# Altium PCB PCB.PcbDoc (part 1 of 2)
Units mil, origin at the board's own origin, x right, y up, seen from the top; angles counter-clockwise.
Board outline 1700 x 700 mil, 4 copper layers (TOP, GND, SIG, BOTTOM), stack 62.441 mil thick; 81 components, 66 nets, 310 pads, 129 vias.
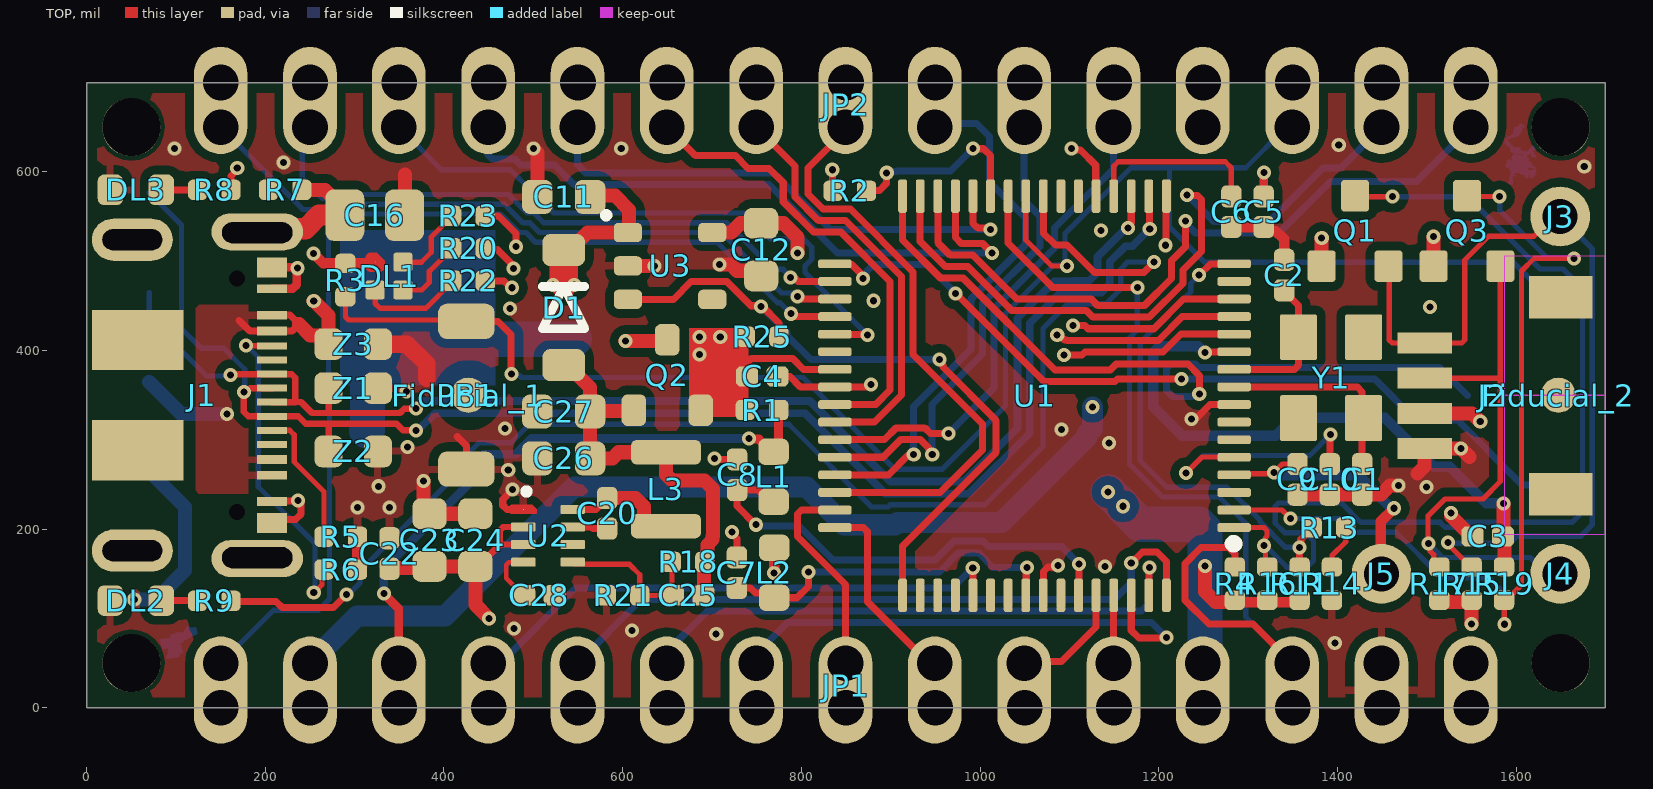
[diagram p0: TOP view]
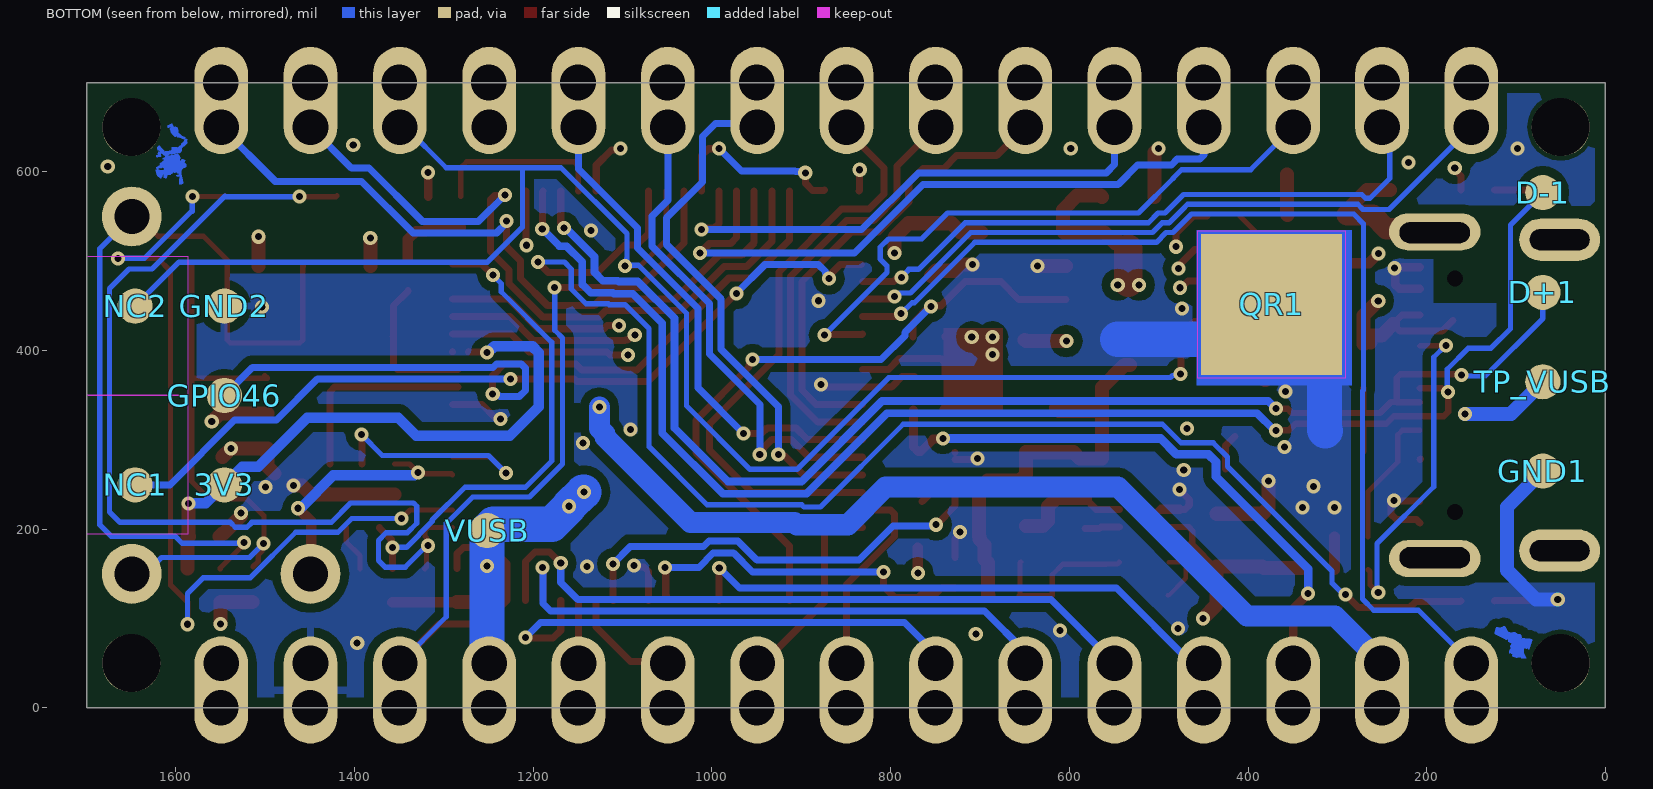
[diagram p1: BOTTOM view, seen from below]
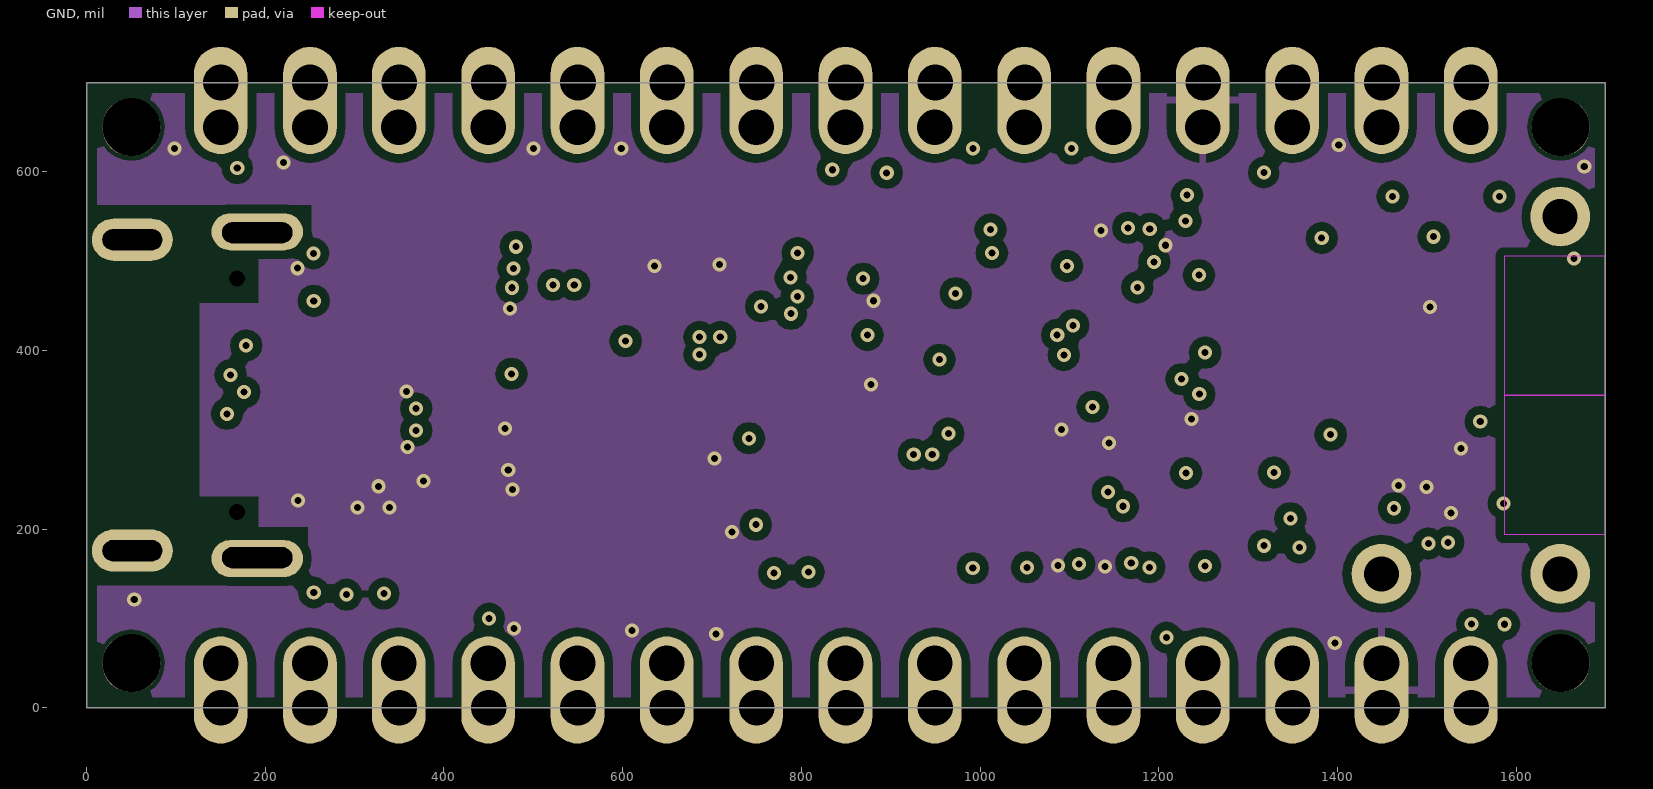
[diagram p2: GND]
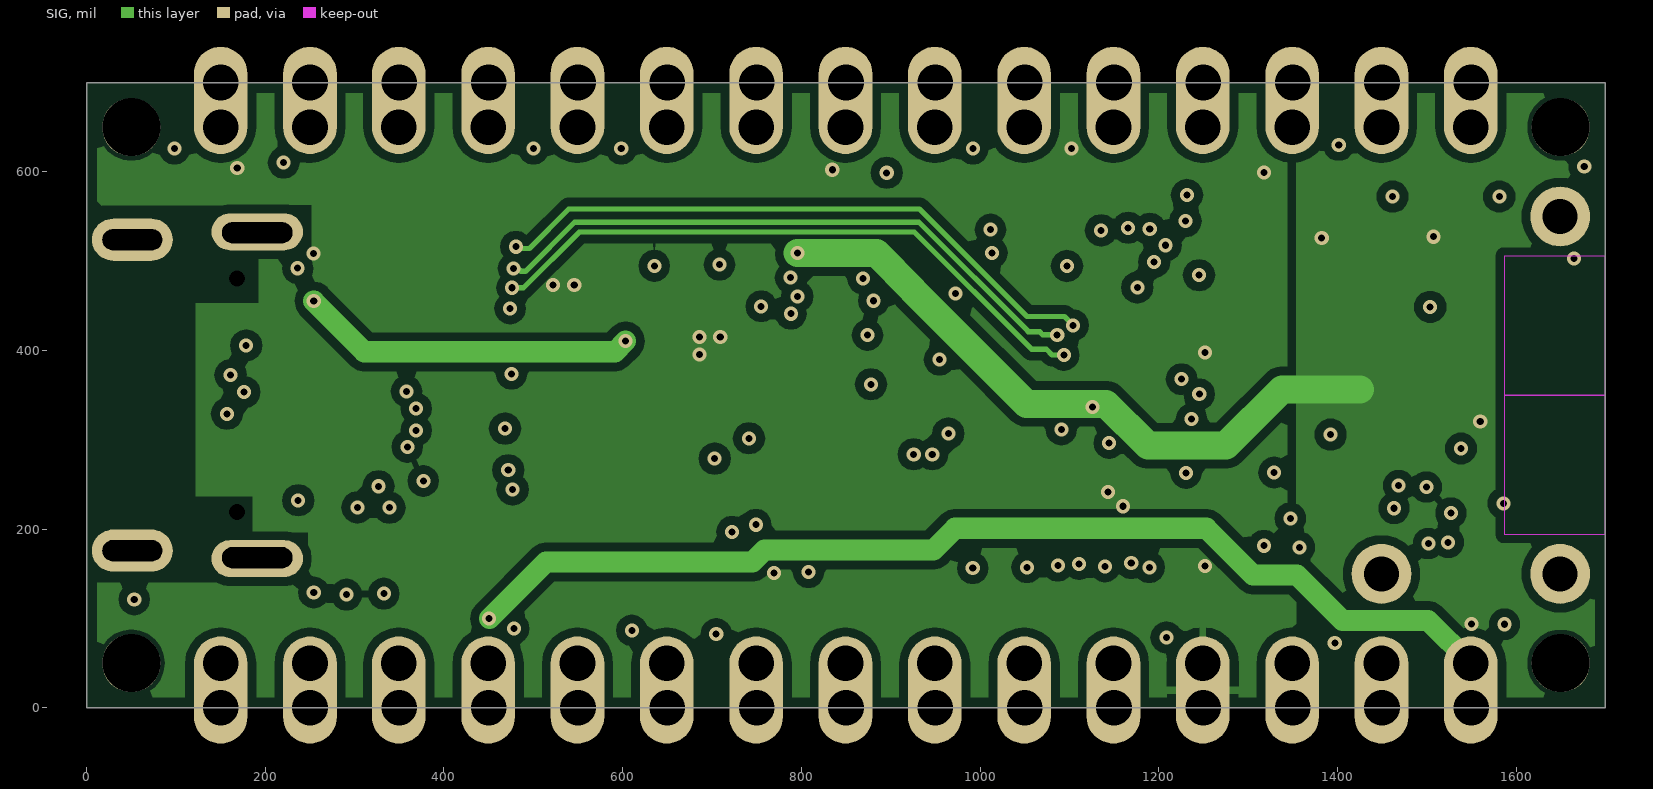
[diagram p3: SIG]
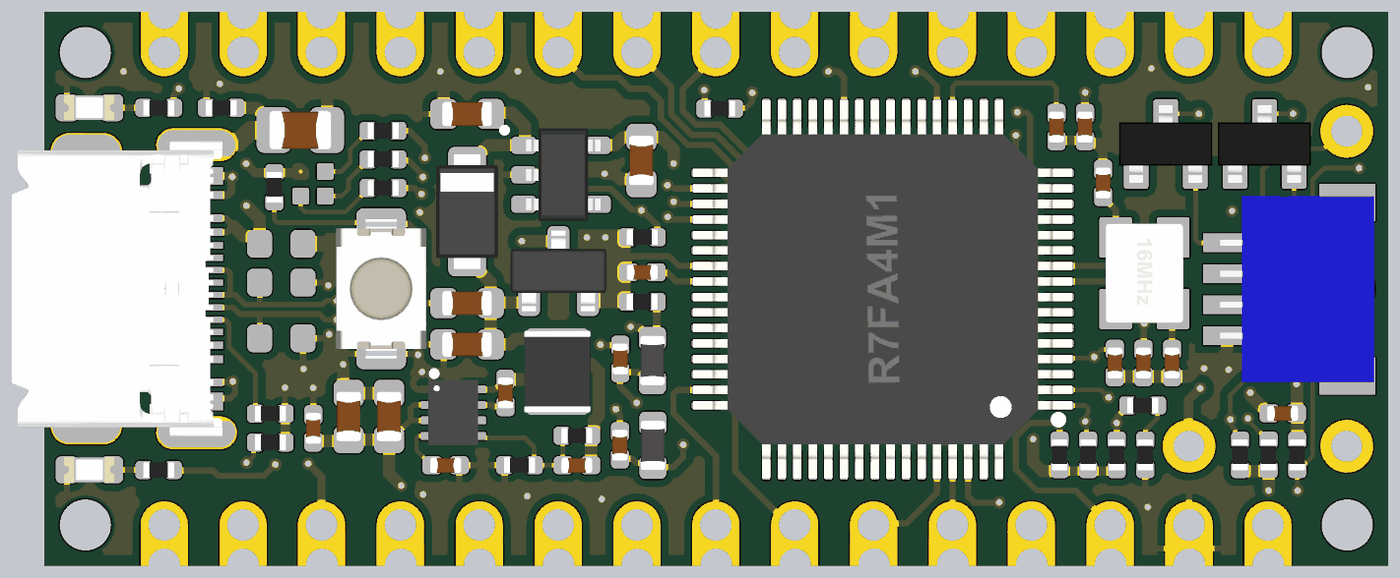
[diagram p5: 3D render of the assembled board from above, using the file's embedded part models]

## Layer stack, top to bottom
Top Solder: solder mask 1, SM-003, Dk 4
TOP: signal copper 0.7087
Dielectric 1: prepreg 5.5118, PP-014, Dk 4.2
GND: signal copper 1.378
Dielectric2: core 47.2441, FR-4, Dk 4.8
SIG: signal copper 1.378
Dielectric3: prepreg 5.5118, PP-014, Dk 4.2
BOTTOM: signal copper 0.7087
Bottom Solder: solder mask 1, SM-003, Dk 4

## Board outline
0,0 1700,0 1700,700 0,700

## Design rules (kind name [scope] priority, off if disabled: settings)
BoardOutlineClearance BoardOutlineClearance_2 [Component = 'J1'] p1: gap=3.94 ignorepadtopadclearanceinfootprint=FALSE
BoardOutlineClearance BoardOutlineClearance_1 [(ObjectKind = 'Pad') And (Name = 'Free-2') And (PadShape_AllLayers = 'Rounded Rectangle') And (AsMM(PadXSize_AllLayers) = 1.3) And (AsMM(PadYSize_AllLayers) = 1.8)] p2: gap=3.94 ignorepadtopadclearanceinfootprint=FALSE
BoardOutlineClearance HeadersCastellated [((ObjectKind = 'Pad') And (Component = 'JP1')) OR                                                                                    ((ObjectKind = 'Pad') And (Component = 'JP2'))] p3: gap=0 ignorepadtopadclearanceinfootprint=FALSE
BoardOutlineClearance Silks [(OnLayer('Top Overlay') OR OnLayer('Bottom Overlay'))] p4: gap=0 ignorepadtopadclearanceinfootprint=FALSE
BoardOutlineClearance [All] p5: gap=11.81 ignorepadtopadclearanceinfootprint=FALSE
Clearance GND_50R [InNetClass('50R') vs InNet('GND')] p1: gap=5 ignorepadtopadclearanceinfootprint=FALSE
Clearance QR [InComponent('QR1') vs InNet('GND')] p2: gap=5.91 ignorepadtopadclearanceinfootprint=FALSE except(0: Arc-SMDPad Arc-Fill Arc-Poly Arc-Region Track-SMDPad Track-Fill Track-Poly Track-Region SMDPad-SMDPad SMDPad-Fill SMDPad-Poly SMDPad-Region THPad-Fill THPad-Poly THPad-Region Via-Fill Via-Poly Via-Region Fill-Fill Fill-Poly Fill-Region Poly-Poly Poly-Region Region-Region)
Clearance COPPER_0.25mm [All] p3: gap=5 ignorepadtopadclearanceinfootprint=FALSE except(9.84: Arc-Fill Arc-Poly Arc-Region Track-Fill Track-Poly Track-Region SMDPad-Fill SMDPad-Poly SMDPad-Region THPad-Fill THPad-Poly THPad-Region Via-Fill Via-Poly Via-Region Fill-Fill Fill-Poly Fill-Region Poly-Poly Poly-Region Region-Region)
Clearance "Generic clearance 0.127mm" [All] p4: gap=5 ignorepadtopadclearanceinfootprint=TRUE
ComponentClearance TP2 [((Name = 'MTDI') OR (Name = 'MTDO') OR (Name = 'MTCK') OR (Name = 'MTMS'))] p1: gap=-78.74 collisioncheckmode=3 verticalgap=0 showdistances=FALSE
ComponentClearance TP [HasFootprint('TP-1.00MM') vs HasFootprint('TP-1.00MM')] p2: gap=7.87 collisioncheckmode=3 verticalgap=-393.7 showdistances=FALSE
ComponentClearance UFL_ANTENNA [InComponent('ANT1') vs HasFootprint('U.FL-R-SMT-1(60)-1')] p3: gap=-787.4 collisioncheckmode=3 verticalgap=-787.4 showdistances=FALSE
ComponentClearance Headers [((Footprint = 'PINHD-1X14_5VF') OR (Footprint = 'PINHD-1X14_5VF') OR (Footprint = 'LEDC1608X80N-AK') OR (Footprint = 'CX90B-16P-Footprint-1') ) vs ((Footprint = 'PINHD-1X14_5VF') OR (Footprint = 'PINHD-1X14_5VF') OR (Footprint = 'LEDC1608X80N-AK') OR (Footprint = 'CX90B-16P-Footprint-1'))] p4: gap=-787.4 collisioncheckmode=3 verticalgap=-787.4 showdistances=FALSE
ComponentClearance RFshield [HasFootprint('Shield RF 10mm x 15mm x 3mm-Footprint-1')] p5: gap=-1968.5 collisioncheckmode=3 verticalgap=-787.4 showdistances=FALSE
ComponentClearance fiducials [InComponent('Fiducial_1') vs InComponent('PB1')] p6: gap=-787.4 collisioncheckmode=3 verticalgap=-787.4 showdistances=FALSE
ComponentClearance [All] p7: gap=7.87 collisioncheckmode=3 verticalgap=0 showdistances=TRUE
DiffPairsRouting USB [InDifferentialPairClass('USB')] p1: maxlimit=9.84 minlimit=5.91 mostfreqgap=9.84 toplayer_maxgap=5.91 toplayer_prefgap=5.91 toplayer_minwidth=8.66 toplayer_maxwidth=8.66 toplayer_prefwidth=8.66 midlayer2_mingap=9.84 midlayer2_minwidth=5.91 midlayer2_maxwidth=5.91 midlayer2_prefwidth=5.91 bottomlayer_maxgap=5.91 bottomlayer_prefgap=5.91 bottomlayer_minwidth=8.66 bottomlayer_maxwidth=8.66 bottomlayer_prefwidth=8.66 impedanceprofiledriven=TRUE impedanceprofileid={0EDCC732-50F3-4DDA-8B94-FDD99B063592} impedanceprofilevalue=90.000000 maxuncoupledlength=500
Height [All] p1: minheight=0 maxheight=1181.1 prefheight=500
HoleSize [All] p1: absolutevalues=TRUE maxlimit=1181.1 minlimit=7.87 maxpercent=80.000 minpercent=20.000
HoleToHoleClearance [All] p1: gap=9.84 allowstackedmicrovias=FALSE
PlaneConnect [All] p1: pad.planeconnectstyle=Relief pad.reliefexpansion=20 pad.reliefentries=4 pad.reliefconductorwidth=5.91 pad.reliefairgap=10 via.planeconnectstyle=Direct via.reliefexpansion=20 via.reliefentries=4 via.reliefconductorwidth=10 via.reliefairgap=10
PolygonConnect 0201 [HasFootprint('RES-0201') OR HasFootprint('CAP-0201')] p1: connectstyle=Relief reliefconductorwidth=5.91 reliefentries=4 polygonreliefangle="90 Angle" airgapwidth=10
PolygonConnect [All] p2: thpad.connectstyle=Relief thpad.reliefconductorwidth=7.87 thpad.reliefentries=4 thpad.polygonreliefangle="90 Angle" thpad.airgapwidth=10 smdpad.connectstyle=Relief smdpad.reliefconductorwidth=7.87 smdpad.reliefentries=4 smdpad.polygonreliefangle="90 Angle" smdpad.airgapwidth=10 via.connectstyle=Direct via.reliefconductorwidth=10 via.reliefentries=4 via.polygonreliefangle="90 Angle" via.airgapwidth=10
RoomDefinition TOP [InComponentClass('TOP')] p1: confinementstyle=ConfineIn formatcopy=TRUE lockcomponents=FALSE outline 1755.91,102.36 1913.39,102.36 1913.39,220.47 1755.91,220.47
RoutingVias StandardVias [All] p1: holewidth=7.87 width=15.75 viastyle="Through Hole" minholewidth=7.87 minwidth=15.75 maxholewidth=7.87 maxwidth=15.75
ShortCircuit [Component = 'SJ1' vs (InNet('+3V3') OR InNet('NetC25_2'))] p1: allowed=TRUE
SilkToSilkClearance [All] p1: silktosilkclearance=7.87
SilkToSolderMaskClearance [IsPad] p1: minsilkscreentomaskgap=5.91 clearancetoexposedcopper=TRUE
SolderMaskExpansion VIAtented [IsVia] p1: expansion=4 istentingtop=TRUE
SolderMaskExpansion [All] p2: expansion=1.97 istentingtop=FALSE
SupplyNets "Schematic Supply Nets_6" [InNet('+VBUS')] p1: voltage=0.000
SupplyNets "Schematic Supply Nets_4" [InNet('+5V')] p2: voltage=0.000
SupplyNets "Schematic Supply Nets_3" [InNet('GND')] p3: voltage=0.000
SupplyNets "Schematic Supply Nets_1" [InNet('+3V3')] p4: voltage=0.000
SupplyNets "Schematic Supply Nets" [InNet('VIN')] p5: voltage=0.000
UnConnectedPin [All] p1:
UnRoutedNet [All] p1: checkbadconnections=TRUE
ViasUnderSMD Flash [(ObjectKind = 'Pad') And (Name = 'U2-9')] p1: allowed=TRUE
ViasUnderSMD uC [(ObjectKind = 'Pad') And (Name = 'U4-49')] p2: allowed=TRUE
ViasUnderSMD [All] p3: allowed=FALSE
Width 50R [InNetClass('50R')] p1: maxlimit=10 minlimit=7.87 preferedwidth=10 toplayer_maxwidth=8.46 toplayer_prefwidth=8.46 impedanceprofiledriven=TRUE impedanceprofileid={0726661E-E8FD-48BE-B853-6BE56F4BAC3B} impedanceprofilevalue=50.000000 minimp=50.000000 maximp=50.000000 favimp=50.000000
Width StandardTraces [All] p2: maxlimit=196.85 minlimit=5 preferedwidth=5.91
20 further rules are at their usual default settings.

## Classes and differential pairs
differential pair class USB: USB_D_1
net class DIGITAL: P102_SPI0_RSPCK_GPT2_B_CAN0_RX_1 P103_SPI0_SSL_GPT2_A_CAN0_TX_1 P104_IRQ01_GPT1_B_1 P105_IRQ00_GPT1_A_1 P106_GPT0_B_1 P107_GPT0_A_1 P109_SCI9_TXD_1 P110_SCI9_RXD_1 P111_GPT3_A_1 P112_GPT3_B_1 P303_GPT7_B_1 P304_GPT7_A_1
net class ANALOG: P000_AN00_AMP+_1 P001_AN01_AMP-_1 P002_AN02_AMPO_1 P003_AN03_1 P004_AN04_1 P014_AN09_DAC_1 P100_AN22_SCL_1 P101_AN21_SDA_1
differential pair USB: +USB_D_1_P -USB_D_1_N

## Components (designator, comment, footprint, x,y, rotation, side; value= is the part's Value field where it differs from the comment)
3V3 "Test point 1.00mm" TP-1.00MM 1545.79,249.65 r270 bottom
C1 "C0402C150J5GACTU" CAP-0402 1427.79,255.73 r270 top value=15pF
C2 "C0402C150J5GACTU" CAP-0402 1340.48,484.45 r90 top value=15pF
C3 "C1005A475M6R3NT" CAP-0402 1568.29,191.83 r0 top value=4.7µF
C4 "GRM155R61H104KE19D" CAP-0402 756.17,370.97 r180 top value=100nF
C5 "GRM155R61H104KE19D" CAP-0402 1317.58,555.36 r90 top value=100nF
C6 "C1005A475M6R3NT" CAP-0402 1281.36,555.36 r90 top value=4.7µF
C7 "GRM155R61H104KE19D" CAP-0402 727.84,151.26 r270 top value=100nF
C8 "CL05A105KP5NNNC" CAP-0402 728.23,260.89 r90 top value=1µF
C9 "GRM155R61H104KE19D" CAP-0402 1355.35,255.74 r90 top value=100nF
C10 "C1005A475M6R3NT" CAP-0402 1391.57,255.74 r90 top value=4.7µF
C11 "GRM188R61A106KE69D" CAP-0603 534.02,571.97 r0 top value=10µF
C12 "GRM188R61A106KE69D" CAP-0603 755.09,512.92 r90 top value=10µF
C16 "FV21X472K102ECG" CAP-0805 322.41,551.48 r180 top value=4.7nF
C20 "GRM155R61H104KE19D" CAP-0402 582.66,217.73 r270 top value=100nF
C22 "GRM155R61H104KE19D" CAP-0402 339.02,172.78 r90 top value=100nF
C23 "C1608A106M250NT" CAP-0603 383.86,187.8 r270 top value=10µF
C24 "C1608A106M250NT" CAP-0603 435.04,187.8 r270 top value=10µF
C25 "0402N220J500CT" CAP-0402 673.23,125.89 r0 top value=22pF
C26 "C1608A106M250NT" CAP-0603 534.02,279.31 r0 top value=10µF
C27 "C1608A106M250NT" CAP-0603 534.02,331.67 r0 top value=10µF
C28 "C1005X5R1E105K050BC" CAP-0402 506.89,125.89 r180 top value=1µF
D1 "PMEG6020AELRX" SOD123-1 534.02,447.99 r270 top
D+1 "Test point 1.00mm" TP-1.00MM 70,465 r180 bottom locked
D-1 "Test point 1.00mm" TP-1.00MM 70,576.81 r180 bottom locked
DL1 "UHD1110-FKA-CL1A13R3Q1BBQFMF3" UHD1110-FKA-CL1A13R3Q1BBQFMF3 338.48,483.3 r0 top
DL2 "KPT-1608YC" LEDC1608X80N-AK#1 55.12,120.08 r0 top
DL3 "HSMG-C190" LEDC1608X80N-AK#2 55.12,579.92 r0 top
Fiducial_1 "Fiducial mark 1mm with 2mm solder" "Fiducial mark 1mm with circle-Footprint-1"#1 427.41,350 r90 top
Fiducial_2 "Fiducial mark 1mm with 2mm solder" "Fiducial mark 1mm with circle-Footprint-1"#2 1647.47,350 r90 top
GND1 "Test point 1.00mm" TP-1.00MM 70,265 r90 bottom
GND2 "Test point 1.00mm" TP-1.00MM 1545.79,449.65 r270 bottom
GPIO46 "Test point 1.00mm" TP-1.00MM 1545.79,349.65 r90 bottom
J1 "CX90B-16P" CX90B-16P-Footprint-1 129.45,350 r270 top locked
J2 "SM04B-SRSS-TB(LF)(SN)" SM04B-SRSS-TB(LF)(SN)-Footprint-1 1573.9,349.41 r270 top locked
J3 "HEADER TH 2.54mm VERT. 1x001POS" "PIN HEADER 2.54mm VERT. 1x1POS"#1 1649.41,550 r0 top
J4 "HEADER TH 2.54mm VERT. 1x001POS" "PIN HEADER 2.54mm VERT. 1x1POS"#1 1649.41,150 r0 top
J5 "HEADER TH 2.54mm VERT. 1x001POS" "PIN HEADER 2.54mm VERT. 1x1POS"#2 1448.82,150 r0 top
JP1 "PINHD-1X15-NANO-ANALOG-CASTELLATED" PINHD-1X14_5VF#1 150,50 r180 top locked
JP2 "PINHD-1X15-NANO-DIGITAL-CASTELLATED" PINHD-1X14_5VF#2 1550,650 r0 top locked
L1 "BLM18PG471SN1D" L-0603 769,258.77 r270 top
L2 "BLM18PG471SN1D" L-0603 769.61,151.21 r270 top
L3 "MLP2520S4R7MT0S1" INDC2520X10L 648.49,244.78 r90 top value=4.7µH
NC1 "Test point 1.00mm" TP-1.00MM 1645.79,249.65 r270 bottom
NC2 "Test point 1.00mm" TP-1.00MM 1645.79,449.65 r270 bottom
PB1 "IT-1185AP1C-160G-GTR" C&K_PTS820_NO_HOLES-1 424.97,350 r90 top locked
Q1 "2N7002KT1G" SOT23 1419.85,533.82 r0 top
Q2 "AO3407" SOT23-3 649.89,372.58 r90 top
Q3 "2N7002KT1G" SOT23 1545.16,533.82 r0 top
QR1 "QR CODE 4x4mm" "QR CODE 4x4mm" 373.61,451.58 r180 bottom
R1 "RC0402FR-075K1L" RES-0402 756,333.37 r180 top value=5.1k
R2 "RC0402FR-075K1L" RES-0402 854.33,578.74 r0 top value=5.1k
R3 "RC0402FR-075K1L" RES-0402 289.55,478.86 r90 top value=5.1k
R4 "RC0402FR-075K1L" RES-0402 1285.3,139.06 r90 top value=5.1k
R5 "RC0402FR-075K1L" RES-0402 284.5,191.42 r180 top value=5.1k
R6 "RC0402FR-075K1L" RES-0402 284.5,154.81 r180 top value=5.1k
R7 "CRCW04021M00FKED" RES-0402 222.28,579.84 r0 top value=1M
R8 "CRCW04021K00FKEDC" RES-0402 142.87,579.84 r0 top value=1k
R9 "CRCW04021K00FKEDC" RES-0402 142.87,119.76 r0 top value=1k
R11 "RC0402FR-075K1L" RES-0402 1357.74,139.06 r270 top value=5.1k
R13 "RC0402FR-075K1L" RES-0402 1390.68,201.85 r180 top value=5.1k
R14 "RC0402FR-075K1L" RES-0402 1393.96,139.06 r90 top value=5.1k
R15 "RC0402FR-075K1L" RES-0402 1550.39,139.06 r90 top value=5.1k
R16 "RC0402FR-075K1L" RES-0402 1321.52,139.06 r90 top value=5.1k
R17 "RC0402FR-075K1L" RES-0402 1514.17,139.06 r90 top value=5.1k
R18 "RC0402FR-071M74L" RES-0402 673.23,163.35 r0 top value=1.74M
R19 "RC0402FR-075K1L" RES-0402 1586.61,139.06 r270 top value=5.1k
R20 "CRCW04021K00FKEDC" RES-0402 427.41,514.34 r180 top value=1k
R21 "CRCW0402220KFKED" RES-0402 600.39,125.89 r0 top value=220k
R22 "CRCW04021K00FKEDC" RES-0402 427.41,478.05 r180 top value=1k
R23 "CRCW04021K00FKEDC" RES-0402 427.41,550.64 r180 top value=1k
R25 "RC0402FR-075K1L" RES-0402 756.17,415.51 r180 top value=5.1k
TP_VUSB "Test point 1.00mm" TP-1.00MM 70,365 r90 bottom
U1 "R7FA4M1AB3CFM#HA0" CQFP50P1200X1200X170-64L 1061.02,349.41 r180 top
U2 "MP2322GQH" QFN50P150X200X90-8L 516.47,192.65 r0 top
U3 "AP2112K-3.3TRG1" SOT25 653.04,494.71 r270 top
VUSB "Test point 1.00mm" TP-1.00MM 1251.76,198.46 r90 bottom
Y1 "FTX16.000M12SM3S-30/30" CRYSTAL_3.2x2.5mm_16MHz 1392.91,369.68 r270 top
Z1 "CG0603MLC-05E" 0603 298.43,357.87 r0 top
Z2 "CG0603MLC-05E" 0603 298.43,287.01 r0 top
Z3 "CG0603MLC-05E" 0603 298.42,407.13 r0 top

## Footprints (in the part's own frame and the unit in brackets; to place one, negate y for a bottom-side part, rotate by r counter-clockwise, add the part's x,y. Pads: shape width x height; smd on the part's side, far side on the other; paste and mask are expansions set on the pad)
0603 [mm] "Body 0603 imperial,1.6x0.8mm, IPC High Density"
  rrect50% 0.8x0.9 smd: 1(-0.7,0) 2(0.7,0)
  body extent -0.87,-0.48 0.87,0.48, height 0.23
C&K_PTS820_NO_HOLES-1 [mm]
  rrect49% 1x1.6 smd mask+0.05: 1(-2.1,0) 2(2.1,0)
  body extent -2.25,-1.45 2.25,1.45, height 2
CAP-0402 [mm] "Chip Capacitor, 2-Leads, Body  0402 (in) 1005 (mm), IPC Medium Density"
  rrect52% 0.63x0.58 smd mask+0.05: 1(-0.435,0) 2(0.435,0)
  body extent -0.5,-0.25 0.5,0.25, height 0.5
CAP-0603 [mm] "Chip Capacitor, Body 0603 imperial,1.6x0.8mm, IPC High Density"
  rrect51% 0.87x0.97 smd mask+0.05: 1(-0.75,0) 2(0.75,0)
  body extent -0.8,-0.4 0.8,0.4, height 0.8
CAP-0805 [mm] "Chip Capacitor, Body 0805 imperial, 2.0x1.2mm, IPC Medium Density"
  rrect45% 1.11x1.47 smd mask+0.05: 1(-0.85,0) 2(0.85,0)
  body extent -1,-0.62 1,0.63, height 1.25
CQFP50P1200X1200X170-64L [mm] "CQFP, 64-Leads, Body 12,00x12,00mm, Pitch 0,50mm, IPC High Density"
  rrect50% 0.95x0.25 smd mask+0.05: 1(-5.675,3.75) 2(-5.675,3.25) 3(-5.675,2.75) 4(-5.675,2.25) 5(-5.675,1.75) 6(-5.675,1.25) 7(-5.675,0.75) 8(-5.675,0.25) 9(-5.675,-0.25) 10(-5.675,-0.75) 11(-5.675,-1.25) 12(-5.675,-1.75) 13(-5.675,-2.25) 14(-5.675,-2.75) 15(-5.675,-3.25) 16(-5.675,-3.75) 33(5.675,-3.75) 34(5.675,-3.25) 35(5.675,-2.75) 36(5.675,-2.25) 37(5.675,-1.75) 38(5.675,-1.25) 39(5.675,-0.75) 40(5.675,-0.25) 41(5.675,0.25) 42(5.675,0.75) 43(5.675,1.25) 44(5.675,1.75) 45(5.675,2.25) 46(5.675,2.75) 47(5.675,3.25) 48(5.675,3.75)
  rrect50% 0.25x0.95 smd mask+0.05: 17(-3.75,-5.675) 18(-3.25,-5.675) 19(-2.75,-5.675) 20(-2.25,-5.675) 21(-1.75,-5.675) 22(-1.25,-5.675) 23(-0.75,-5.675) 24(-0.25,-5.675) 25(0.25,-5.675) 26(0.75,-5.675) 27(1.25,-5.675) 28(1.75,-5.675) 29(2.25,-5.675) 30(2.75,-5.675) 31(3.25,-5.675) 32(3.75,-5.675) 49(3.75,5.675) 50(3.25,5.675) 51(2.75,5.675) 52(2.25,5.675) 53(1.75,5.675) 54(1.25,5.675) 55(0.75,5.675) 56(0.25,5.675) 57(-0.25,5.675) 58(-0.75,5.675) 59(-1.25,5.675) 60(-1.75,5.675) 61(-2.25,5.675) 62(-2.75,5.675) 63(-3.25,5.675) 64(-3.75,5.675)
  silkscreen extent -5.78,4.08 -5.53,4.33, body extent -6.1,-6.1 6.1,6.1, height 1.67
CRYSTAL_3.2x2.5mm_16MHz [mm]
  rrect10% 1.3x1.05 smd: 1(-1.15,-0.925) 2(1.15,-0.925) 3(1.15,0.925) 4(-1.15,0.925)
  body extent -1.6,-1.25 1.6,1.25, height 0.8
CX90B-16P-Footprint-1 [mm]
  rect 0.57x0.85 smd mask+0.05: A1(-3.635,1.988) A12(3.635,1.988)
  rect 0.25x0.85 smd mask+0.05: A4(-2.275,1.988) A9(2.275,1.988) B1(3.025,1.988) B4(1.825,1.988) B9(-1.825,1.988) B12(-3.025,1.988)
  rect 0.2x0.85 smd mask+0.05: A5(-1.4,1.988) A6(-0.6,1.988) A7(0.6,1.988) A8(1.4,1.988) B5(1,1.988) B6(0.2,1.988) B7(-0.2,1.988) B8(-1,1.988)
  round 0.2 hole 0.45 unplated paste-2539.97 mask+0.2: FIXING(-3.32,0.988) FIXING(3.32,0.988)
  rect 1.71x2.6 smd paste-0.3 mask+0.05: FIXING(-1.565,-1.837) FIXING(1.565,-1.837)
  oval 1.05x2.6 hole 0.6 slot 2 at 90 deg copper offset -0.025,0 mask+0.05: SHIELD1(-4.62,1.563)
  oval 1.05x2.6 hole 0.6 slot 2 at 90 deg copper offset 0.025,0 mask+0.05: SHIELD2(4.62,1.563)
  oval 1.2x2.3 hole 0.6 slot 1.7 at 90 deg mask+0.05: SHIELD3(-4.42,-1.987) SHIELD4(4.42,-1.987)
  body extent -4.77,-4.4 4.77,2.4, height 3.17
"Fiducial mark 1mm with circle-Footprint-1"#1 [mm]
  round 1 smd paste-10 mask+0.05: 1(0,0)
  TOP pour cut-out: 0,1 0.383,0.924 0.707,0.707 0.924,0.383 1,0 1,0 0.924,-0.383 0.707,-0.707 0.383,-0.924 0,-1 0,-1 -0.383,-0.924 -0.707,-0.707 -0.924,-0.383 -1,0 -1,0 -0.924,0.383 -0.707,0.707 -0.383,0.924 0,1
"Fiducial mark 1mm with circle-Footprint-1"#2 [mm]
  round 1 smd paste-10 mask+0.5: 1(0,0)
  TOP pour cut-out: 0,1 0.383,0.924 0.707,0.707 0.924,0.383 1,0 1,0 0.924,-0.383 0.707,-0.707 0.383,-0.924 0,-1 0,-1 -0.383,-0.924 -0.707,-0.707 -0.924,-0.383 -1,0 -1,0 -0.924,0.383 -0.707,0.707 -0.383,0.924 0,1
INDC2520X10L [mm] "Chip Inductor, 2-Leads, Body 2.50x2.00mm, IPC High Density"
  rrect50% 0.7x2 smd mask+0: 1(-1.05,0) 2(1.05,0)
  body extent -1.33,-1.07 1.33,1.07, height 1
L-0603 [mm] "Chip Inductor - Body 0603 imperial,1.6x0.8mm, IPC High Density"
  rrect51% 0.75x0.87 smd mask+0.05: 1(-0.71,0) 2(0.71,0)
  body extent -0.8,-0.4 0.8,0.4, height 0.8
LEDC1608X80N-AK#1 [mm]
  rrect50% 0.72x0.87 smd: A(0.725,0) C(-0.725,0)
  body extent -0.8,-0.4 0.8,0.4, height 0.79
LEDC1608X80N-AK#2 [mm]
  rrect50% 0.72x0.87 smd mask+0.05: A(0.725,0) C(-0.725,0)
  body extent -0.8,-0.4 0.8,0.4, height 0.79
"PIN HEADER 2.54mm VERT. 1x1POS"#1 [mm]
  round 1.7 hole 1 mask+0.05: 1(0,0)
"PIN HEADER 2.54mm VERT. 1x1POS"#2 [mm]
  round 1.7 hole 1 mask+0.05: 1(0.015,0)
PINHD-1X14_5VF#1 [mil]
  oval 60x120 hole 40 copper offset 0,30 paste-99999: 1(0,0) 2(-100,0) 3(-199.41,0) 4(-299.41,0) 5(-399.41,0) 6(-499.41,0) 7(-599.41,0) 8(-699.41,0) 9(-799.41,0) 10(-899.41,0) 11(-999.41,0) 12(-1099.41,0) 13(-1199.41,0) 14(-1299.41,0) 15(-1399.41,0)
  round 27.56 hole 40 mask+7.87: 1(0,50) 2(-100,50) 3(-200,50) 4(-300,50) 5(-400,50) 6(-500,50) 7(-600,50) 8(-700,50) 9(-800,50) 10(-900,50) 11(-1000,50) 12(-1100,50) 13(-1200,50) 14(-1300,50) 15(-1400,50)
PINHD-1X14_5VF#2 [mil]
  oval 60x120 hole 40 copper offset 0,30 paste-99999: 1(-0.59,0) 2(-100.59,0) 3(-200.59,0) 4(-300.59,0) 5(-400.59,0) 6(-500.59,0) 7(-600.59,0) 8(-700.59,0) 9(-800.59,0) 10(-900.59,0) 11(-1000.59,0) 12(-1100.59,0) 13(-1200.59,0) 14(-1300,0) 15(-1400,0)
  round 27.56 hole 40 mask+7.87: 1(0,50) 2(-100,50) 3(-200,50) 4(-300,50) 5(-400,50) 6(-500,50) 7(-600,50) 8(-700,50) 9(-800,50) 10(-900,50) 11(-1000,50) 12(-1100,50) 13(-1200,50) 14(-1300,50) 15(-1400,50)
QFN50P150X200X90-8L [mm] "QFN, 8-Leads, Body 1,50x2,00mm, Pitch 0,50mm, IPC High Density"
  round 0.025 smd mask+0.05: 1(-0.7,0.75)
  rrect25% 0.7x0.25 smd mask+0.05: 2(-0.7,0.25) 3(-0.7,-0.25) 4(-0.7,-0.75) 5(0.7,-0.75) 6(0.7,-0.25) 7(0.7,0.25) 8(0.7,0.75)
  TOP region: -1.044,0.625 -1.056,0.627 -1.066,0.634 -1.073,0.644 -1.075,0.656 -1.075,0.656 -1.075,0.844 -1.073,0.856 -1.066,0.866 -1.056,0.873 -1.044,0.875 -1.044,0.875 -0.452,0.875 -0.325,0.748 -0.325,0.656 -0.327,0.644 -0.334,0.634 -0.344,0.627 -0.356,0.625 -0.356,0.625
  silkscreen extent -0.66,1.21 -0.56,1.31, body extent -0.8,-1.05 0.8,1.05, height 0.9
"QR CODE 4x4mm" [mm]
  rect 4x4 smd paste-2539.97 mask+0.1: PAD(0,0)
  TOP keep-out region: -2.1,2.1 2.1,2.1 2.1,-2.1 -2.1,-2.1
RES-0402 [mm] "Chip Resistor, 2-Leads, Body  0402 (in) 1005 (mm), IPC Medium Density"
  rrect51% 0.55x0.58 smd mask+0.05: 1(-0.475,0) 2(0.475,0)
  body extent -0.5,-0.25 0.5,0.25, height 0.34
SM04B-SRSS-TB(LF)(SN)-Footprint-1 [mm]
  rect 0.6x1.55 smd mask+0.05: 1(1.5,-1.937) 2(0.5,-1.937) 3(-0.5,-1.937) 4(-1.5,-1.937)
  rect 1.2x1.8 smd mask+0.05: FIX(-2.8,1.938) FIX(2.8,1.938)
  body extent -3,-2.15 3,2.8, height 2.98
SOD123-1 [mm]
  rrect50% 0.91x1.22 smd: A(1.635,0) C(-1.635,0)
  silkscreen extent -0.6,-0.6 0.6,0.6, body extent -1.85,-1 1.85,1, height 1.2
SOT23 [mm]
  rrect25% 0.8x0.9 smd: 1(-0.95,-1) 2(0.95,-1) 3(0,1)
  body extent -1.5,-1.25 1.5,1.25, height 1.05
SOT23-3 [mm] "SOT23, 3-Leads, Body 2.95x2.48mm, Pitch 0.95mm, IPC Medium Density"
  rrect50% 0.9x0.7 smd: 1(-1,0.95) 2(-1,-0.95) 3(1,0)
  body extent -1.3,-1.55 1.3,1.55, height 1.15
SOT25 [mil]
  rrect50% 21.65x31.5 smd mask+1.97: 1(-37.4,-47.24) 2(0,-47.24) 3(37.4,-47.24) 4(37.4,47.24) 5(-37.4,47.24)
  silkscreen extent -59,-74 -55,-70, body extent -59,-44 59,50, height 43
TP-1.00MM [mm]
  rrect100% 1x1 smd paste-2.54: X(0,0)
UHD1110-FKA-CL1A13R3Q1BBQFMF3 [mm]
  rrect25% 0.54x0.54 smd mask+0.05: 1(-0.395,-0.395) 2(0.395,-0.395) 3(0.395,0.395)
  round 0.025 smd mask+0.05: 4(-0.395,0.395)
  TOP region: -0.35,0.665 -0.125,0.44 -0.125,0.265 -0.136,0.212 -0.166,0.166 -0.212,0.136 -0.265,0.125 -0.265,0.125 -0.525,0.125 -0.578,0.136 -0.624,0.166 -0.654,0.212 -0.665,0.265 -0.665,0.265 -0.665,0.525 -0.654,0.578 -0.624,0.624 -0.578,0.654 -0.525,0.665 -0.525,0.665
  body extent -0.5,-0.5 0.5,0.5, height 0.63

## Part data
3V3 D+1 D-1 GND1 GND2 GPIO46 NC1 NC2 TP_VUSB VUSB: library part UT0013-A.6, Manufacturer="This is not a component", Code Arduino="This is not a component", Design Item ID=CMP-018-0005-A.3, Part Number="This is not a component", Pin Count=1, Source=ut.SchLib
C1 C2: library part C0025-A.16, "CAP CHIP 0402 15pF 5% 50V C0G", Case Code (Imperial)=0402, Dielectric=C0G, Manufacturer=KEMET, Tolerance=5%, Voltage=50V, Code Arduino=A5498, Part Number=C0402C150J5GACTU, Technology=Ceramic
C3 C6 C10: library part C0037-A.14, "CAP CHIP 0402 4.7uF 20% 6V3 X5R", Case Code (Imperial)=0402, Dielectric=X5R, Manufacturer=Hottech, Manufacturer 2="Samsung Electro-Mechanics", Manufacturer 3="Murata Electronics", Part number 2=CL05A475KQ5NRNC, Part number 3=GRM155R60J475ME47D, Tolerance=20%, Voltage=6.3V, Code Arduino=0833, Part Number=C1005A475M6R3NT, Technology=Ceramic
C4 C5 C7 C9 C20 C22: library part C0015-A.14, "CAP CHIP 0402 100nF 10% 50V X5R", Case Code (Imperial)=0402, Dielectric=X5R, Manufacturer=Murata, Tolerance=10%, Voltage=50V, Code Arduino=A5141, Part Number=GRM155R61H104KE19D, Technology=Ceramic
C8: library part C0017-A.14, "CAP CHIP 0402 1uF 10% 10V X5R", Case Code (Imperial)=0402, Dielectric=X5R, Manufacturer="Samsung Electro-Mechanics", Manufacturer 2="Murata Electronics", Part number 2=GCM155C71A105KE38D, Tolerance=10%, Voltage=10V, Code Arduino=0133, Part Number=CL05A105KP5NNNC, Technology=Ceramic
C11 C12: library part C0163-A.1, "CAP CHIP 0603 10uF 10% 10V X5R", Case Code (Imperial)=0603, Dielectric=X5R, Manufacturer=Murata, Tolerance=10%, Voltage=10V, Code Arduino=C0163, Part Number=GRM188R61A106KE69D, Technology=SMD
C16: library part C0059-A.14, "CAP CHIP 0805 4.7nF 10% 1000V X7R", Case Code (Imperial)=0805, Dielectric=X7R, Manufacturer="PSA Shenzen", Manufacturer 2=KEMET, Part number 2=C0805V472KDRACTU, Part number 3=C0805C472KDRACTU, Tolerance=10%, Voltage=1kV, Code Arduino=0689, Manufacturer 3=KEMET, Part Number=FV21X472K102ECG, Technology=Ceramic
C23 C24 C26 C27: library part C0047-A.18, "CAP CHIP 0603 10uF 20% 25V X5R", Case Code (Imperial)=0603, Dielectric=X5R, Manufacturer=Hottech, Manufacturer 2="Murata Electronics", Part number 2=CL10A106MA8NRNC, Tolerance=20%, Voltage=25V, Code Arduino=2213, Part Number=C1608A106M250NT, Technology=Ceramic
C25: library part C0029-A.14, "CAP CHIP 0402 22pF 5% 50V C0G", Case Code (Imperial)=0402, Dielectric=C0G, Manufacturer=Walsin, Manufacturer 2="Murata Electronics", Manufacturer 3=KEMET, Part number 2=GRM1555C1H220JA01D, Part number 3=C0402C220K5GAC7867, Tolerance=5%, Voltage=50V, Code Arduino=0137, Part Number=0402N220J500CT, Technology=Ceramic
C28: library part C0177-A.1, "CAP CHIP 0402 1uF 10% 50V X5R", Case Code (Imperial)=0402, Dielectric=X5R, Manufacturer=TDK, Tolerance=10%, Voltage=25V, Code Arduino=C0177, Part Number=C1005X5R1E105K050BC, Technology=Ceramic
D1: library part D0026-A.6, "DIODE SCHOTTKY SMD 2A 60V SOD123FL", Forward Current=2A, Forward Voltage=0.6V, Manucturer Part Number 2=SS26L, Manufacturer=Nexperia, Code Arduino=2208, Device Type="Diode Schottky", Manucturer 2=Hottech, Part Number=PMEG6020AELRX, RoHS Compliance=RoHS3
DL1: library part L0026-A.4, "LED RGB BLACK BODY SMD", Manufacturer="Cree LED", Code Arduino=L0026, Part Number=UHD1110-FKA-CL1A13R3Q1BBQFMF3, Pin Count=4
DL2: library part L0008-A.5, "LED SMD 0603 GIA588   8mcd 120^", Manufacturer=Kingbright, Code Arduino=2243, Part Number=KPT-1608YC, Pin Count=2
DL3: library part L0009-A.5, "LED SMD 0603 GREEN/568 15mcd 120^", Manufacturer=Broadcom, Code Arduino=2204, Part Number=HSMG-C190, Pin Count=2
Fiducial_1 Fiducial_2: library part UT0024-A.6
J1: library part J0272-A.3, "CONN RCPT USB3.1 TYPEC 16POS SMD", Manufacturer=Hirose, Code Arduino=J0272, Part Number=CX90B-16P
J2: library part J0005-A.2, "CONN JST 4POS SIDE 1MM TIN QWIIC", Manufacturer=JST, Code Arduino=J0005, Part Number=SM04B-SRSS-TB(LF)(SN)
J3 J4 J5: library part J0176-A.7, Code Arduino=J0176
JP1: library part J0158-A.4, "CONN THD SOCKET F/1/D 15V JANALOG NANO-TYPE CASTELLATED", Code Arduino=0646, Pin Count=15
JP2: library part J0183-A.4, "CONN THD SOCKET F/1/D 15V JDIGITAL NANO-TYPE CASTELLATED", Code Arduino=0646, Pin Count=15
L1 L2: library part I0006-A.7, "FERRITE SMD 0603 470R 1A 0.2R", Case Code (Imperial)=0603, Case Code (Metric)=1608, Current=1A, DC Resistance (DCR)=200mR, Manufacturer=Murata, Max Operating Temperature=125°C, Min Operating Temperature=-55°C, Package Quantity=1, Test Frequency=100MHz, Tolerance=25%, Code Arduino=2200, Device Type=Ferrite, Max DC Current=1A, Packaging="Tape and Reel", Part Number=BLM18PG471SN1D
L3: library part I0027-A.7, "IND FIXED SMD 4.7UH 1A 130mOHM", Case Code (Imperial)=1008, Case Code (Metric)=2520, Current=1A, DC Resistance (DCR)=169mR, Inductance=4.7µH, Manufacturer=TDK, Max Operating Temperature=125°C, Min Operating Temperature=-40°C, Package Quantity=3000, Test Frequency=2MHz, Tolerance=20%, Code Arduino=I0027, Device Type=Inductor, Packaging="Tape and Reel", Part Number=MLP2520S4R7MT0S1
PB1: library part B0001-A.7, "PUSHBUTTON WHITE NO ANCHORS", Color=White, Manufacturer=Switronic, Code Arduino=0173, Mount=SMT, Part Number=IT-1185AP1C-160G-GTR
Q1 Q3: library part T0004-A.10, "MOSFET N-CH 60V 300mA ESD prot. SOT23", Manufacturer="On Semiconductor", Manufacturer 2=Hottech, Manufacturer Part Number 2=2N7002K, Code Arduino=A5393, Device Type="Mosfet N-CH SMD", Part Number=2N7002KT1G, Pin Count=3
Q2: library part T0056-1, "MOSFET P-CH 30V 3.5A SOT23 VGSmin=1.4-2.4V RDSon max 87mOhm (-4.5V)", Manufacturer=Hottech, Code Arduino=T0056, Part Number=AO3407
QR1: library part QR-0001-A.3, "QR CODE 4x4mm on layer 34 (This is not a component)", Manufacturer="This is not a component", Code Arduino=QRCODE_4x4mm, Part Number="This is not a component"
R1 R2 R3 R4 R5 R6 R11 R13 R14 R15 R16 R17 R19 R25: library part R0210-A.19, "RES CHIP 0402 5k1 1% 1/16W", Case Code (Imperial)=0402, Manufacturer=YAGEO, Power=62.5mW, Temperature Coefficient=100ppm, Tolerance=1%, Code Arduino=R0210, Part Number=RC0402FR-075K1L, Technology="Thick film"
R7: library part R0058-A.24, "RES CHIP 0402 1M 1% 1/16W", Case Code (Imperial)=0402, Manufacturer=Vishay, Power=62.5mW, Temperature Coefficient=100ppm, Tolerance=1%, Code Arduino=0139, Part Number=CRCW04021M00FKED, Technology="Thick film"
R8 R9 R20 R22 R23: library part R0007-A.24, "RES CHIP 0402 1k 1% 1/16W", Case Code (Imperial)=0402, Manufacturer=Vishay, Power=62.5mW, Temperature Coefficient=100ppm, Tolerance=1%, Code Arduino=0140, Part Number=CRCW04021K00FKEDC, Technology="Thick film"
R18: library part R0367-A.1, "RES CHIP 0402 1.74M 1% 1/16W", Case Code (Imperial)=0402, Manufacturer=YAGEO, Power=62.5mW, Temperature Coefficient=100ppm, Tolerance=1%, Code Arduino=R0367, Part Number=RC0402FR-071M74L, Technology="Thick film"
R21: library part R0028-A.24, "RES CHIP 0402 220k 1% 1/16W", Case Code (Imperial)=0402, Manufacturer=Vishay, Power=62.5mW, Temperature Coefficient=200ppm, Tolerance=1%, Code Arduino=2334, Part Number=CRCW0402220KFKED, Technology="Thick film"
U1: library part U0274-A.8, "IC uC RA4M1 32b M4 48MHz 254KB flash 32KB RAM 105°C LQFP64 10x10mm", Manufacturer=Renesas, Code Arduino=U0274, Part Number=R7FA4M1AB3CFM#HA0
U2: library part U0072-A.8, "IC STEP DOWN CONV 1A 22V QFN8", Manufacturer="Monolithic Power Systems", Code Arduino=U0072, Part Number=MP2322GQH
U3: library part U0027-A.11, "IC LDO Vin max 6.5V Vout 3V3 Iout 600mA +EN  SOT25", Manufacturer="Diodes Inc", Code Arduino=2199, Part Number=AP2112K-3.3TRG1
Y1: library part X0019-A.12, "CRYSTAL 16.0000MHz 12pF SMD", Frequency=16MHz, Manufacturer="Fronter Electronics", Code Arduino=0395, Part Number=FTX16.000M12SM3S-30/30
Z1 Z2 Z3: library part P0007-A.3, "VARISTOR SMD 0603 VDC 5V ESD PROTECTION", Manufacturer=Bourns, Voltage=5V, Code Arduino=0010, Device Type=Varistor, Part Number=CG0603MLC-05E

## Free pads (board coordinates)
  round 65 hole 65 unplated: MH(50,50) MH(50,650) MH(1650,50) MH(1650,650)

## Via types
v1: diameter 15.75, hole 7.87, TOP to BOTTOM, tented both sides, 129 vias

## Nets (pads, with @x,y where several pads share a name; then routed paths per layer and width w, separated by ;. In a path a pad name is that pad's centre, name@x,y a point inside that pad or via, vN(x,y) a via of type N, cw(c..) or ccw(c..) an arc to the next point about the centre after c; other vN are vias at no path point)
+3V3: C12.2 J2.2 JP1.2 Q1.1 Q3.1 R15.1 R17.1 U3.5 | length 2109.2
  TOP w7.87: R17.1@1513.58,118.39 R17.1@1514.17,118.39
  TOP w15.75: U3.5@698.32,532.11 721.57,532.11 731.9,542.45 C12.2@755.09,542.45 780.08,542.45 795.94,526.59 v1(795.94,509.02) ; Q1.1@1382.45,494.45 1382.45,525.95 v1(1382.52,526.02) ; J2.2@1497.62,329.72 1550.58,329.72 v1(1559.97,320.34) ; Q3.1@1507.76,494.45 v1(1507.76,527.38) ; R17.1@1514.17,118.39 1550.39,118.39 1550.39,93.71 v1(1550.33,93.64)
  SIG w31.5: v1(795.94,509.02) 884.03,509.02 925.2,467.85 925.2,467.27 1052.23,340.23 1141.19,340.23 1187.91,293.51 1275.1,293.51 1338.05,356.46 1425.07,356.46
  BOTTOM w23.62: JP1.2@250,50 302.69,102.69 401.23,102.69 545.76,247.21 805.71,247.21 847.94,204.98 905.1,204.98 907.68,207.56 1024.25,207.56 1119.87,303.18 1119.87,306.62 1126,312.75 v1(1126,336.94)
+5V: 3V3.X C3.2 C4.2 C5.2 C11.2 D1.C DL1.4 JP1.12 L2.1 Q2.2 R1.2 R2.1 R3.2 R4.1 R8.2 R11.2 R16.1 R19.1 R25.2 U1.11 U1.21 U1.39 U3.1 VUSB.X | length 1726.6
  TOP w7.87: R8.2@161.57,579.86 161.57,595.2 168.58,602.21 v1(168.58,604.17) ; C4.2@738.71,371.3 C4.2@739.04,370.97 739.04,386.33 744.04,391.33 790.13,391.33 802.52,378.94 U1.39@831.69,378.94 ; v1(834.65,602.36) 835.14,601.87 835.14,579.23 R2.1@835.63,578.74 ; v1(1102.36,625.98) 1103.87,624.48 1112.53,624.48 1129.57,607.43 1129.57,579.09 U1.21@1129.92,578.74 ; v1(1251.97,397.64) 1252.46,398.13 1272.31,398.13 U1.11@1272.8,398.62
  TOP w9.84: C5.2@1317.52,572.54 1317.62,572.65 1317.62,599.23 v1(1317.67,599.27)
  TOP w11.81: v1(253.85,508.69) 264.95,497.59 R3.2@289.55,497.56 R3.2@289.55,497.56 321.64,497.56 DL1.4@322.93,498.85 ; v1(769.61,150.89) L2.1@769.61,179.16 ; R4.1@1285.3,118.39 1321.52,118.39 R11.2@1357.74,118.39 ; v1@1585.13,228.3 v1(1585.76,228.93)
  TOP w15.75: D1.C@529.05,512.36 D1.C@534.02,512.36 535.48,512.36 D1.C@545.44,522.32 ; D1.C@548.05,519.71 560.46,532.11 U3.1@605.8,532.11 605.8,533.68 607.19,535.07 607.19,557.34 591.22,573.3 564.88,573.3 C11.2@563.55,571.97 ; 687.09,363.18 687.09,333.41 Q2.2@687.29,333.21 687.37,333.29 737.23,333.29 R1.2@737.3,333.37 ; v1(1251.76,159.03) 1251.76,130.14 1263.52,118.39 R4.1@1285.3,118.39 ; C3.2@1585.42,191.83 1587.02,190.23 R19.1@1587.02,156.19 ; v1(1585.76,228.93) 1586.13,228.56 C3.2@1586.13,192.54
  TOP w31.5: 534.01,475.73 D1.C@534.02,512.36 D1.C@534.01,514.33
  BOTTOM w11.81: v1(1251.97,397.64) 1250.9,397.64 1243.99,404.55 1200.94,404.55 1194.02,397.63 1194.02,336.94 1226.55,304.41 1330.87,304.41 1351.09,324.63 1453.06,324.63 1507.88,269.8 1525.63,269.8 3V3.X@1545.79,249.65 1566.5,228.93 v1(1585.76,228.93)
  BOTTOM w39.37: v1(1143.13,241.61) 1144.1,241.61 v1(1160.01,225.7) ; v1@1160.01,224.85 1179.42,205.44 1244.79,205.44 VUSB.X@1251.76,198.46 v1(1251.76,159.03) 1251.76,52.36 JP1.12@1249.41,50
  other v1: 685.94,395.46 685.94,415.14 709.25,415.14 522.2,473.58 545.82,473.58
+VBUS: J1.A4 J1.A9 J1.B4 J1.B9 Q2.3 TP_VUSB.X Z3.1 | length 730.7
  TOP w7.87: 170.76,433.69 182.6,421.85 J1.B9@207.7,421.85 230.1,421.85 237.76,429.51 227.7,439.57 J1.A4@207.7,439.57 ; J1.B4@207.11,278.73 J1.B4@207.7,278.15
  TOP w15.75: 237.76,429.51 250.3,416.97 262.98,416.97 Z3.1@262.98,409.1 ; v1(254.2,455.54) 254.3,455.54 270.86,438.98 Z3.1@270.86,407.13 ; v1(603.28,410.51) 648.45,410.51 Q2.3@649.89,411.95
  SIG w23.62: v1(254.2,455.54) 254.3,455.44 254.3,455.06 310.79,398.57 591.34,398.57 v1(603.28,410.51)
  BOTTOM w15.75: TP_VUSB.X@70,365 105.85,329.15 v1(157.03,329.15)
AREF_1: JP1.3 L1.1 R1.1 | length 674.3
  TOP w9.84: v1(332.63,127.86) 349.41,111.08 JP1.3@349.41,50 ; v1(741.35,301.68) 742.18,300.84 752.52,300.84 766.64,286.72 L1.1@769,286.72 774.33,292.05 774.33,332.99 R1.1@774.7,333.37
  BOTTOM w9.84: v1(332.63,127.86) 332.63,155.43 435.86,258.66 435.86,275.39 444.35,283.88 480.19,283.88 497.99,301.68 v1(741.35,301.68)
CC1_1: J1.A5 R6.2 | length 369.2
  TOP w5.91: v1(178.59,405.53) 178.79,405.32 207.49,405.32 J1.A5@207.7,405.12 ; v1(254.2,129.2) 254.86,129.2 263.43,137.77 263.43,152.44 R6.2@265.8,154.81
  BOTTOM w5.91: v1(178.59,405.53) 179.07,405.53 192.08,392.51 192.08,247.51 255.66,183.93 255.66,130.66 v1(254.2,129.2)
CC2_1: J1.B5 R5.2 | length 154.8
  TOP w5.91: J1.B5@207.7,310.63 227.38,310.63 232.38,305.63 232.38,275.38 265.8,241.97 R5.2@265.8,191.42